# EAGLE board smd_old (EAGLE 7.3.0)
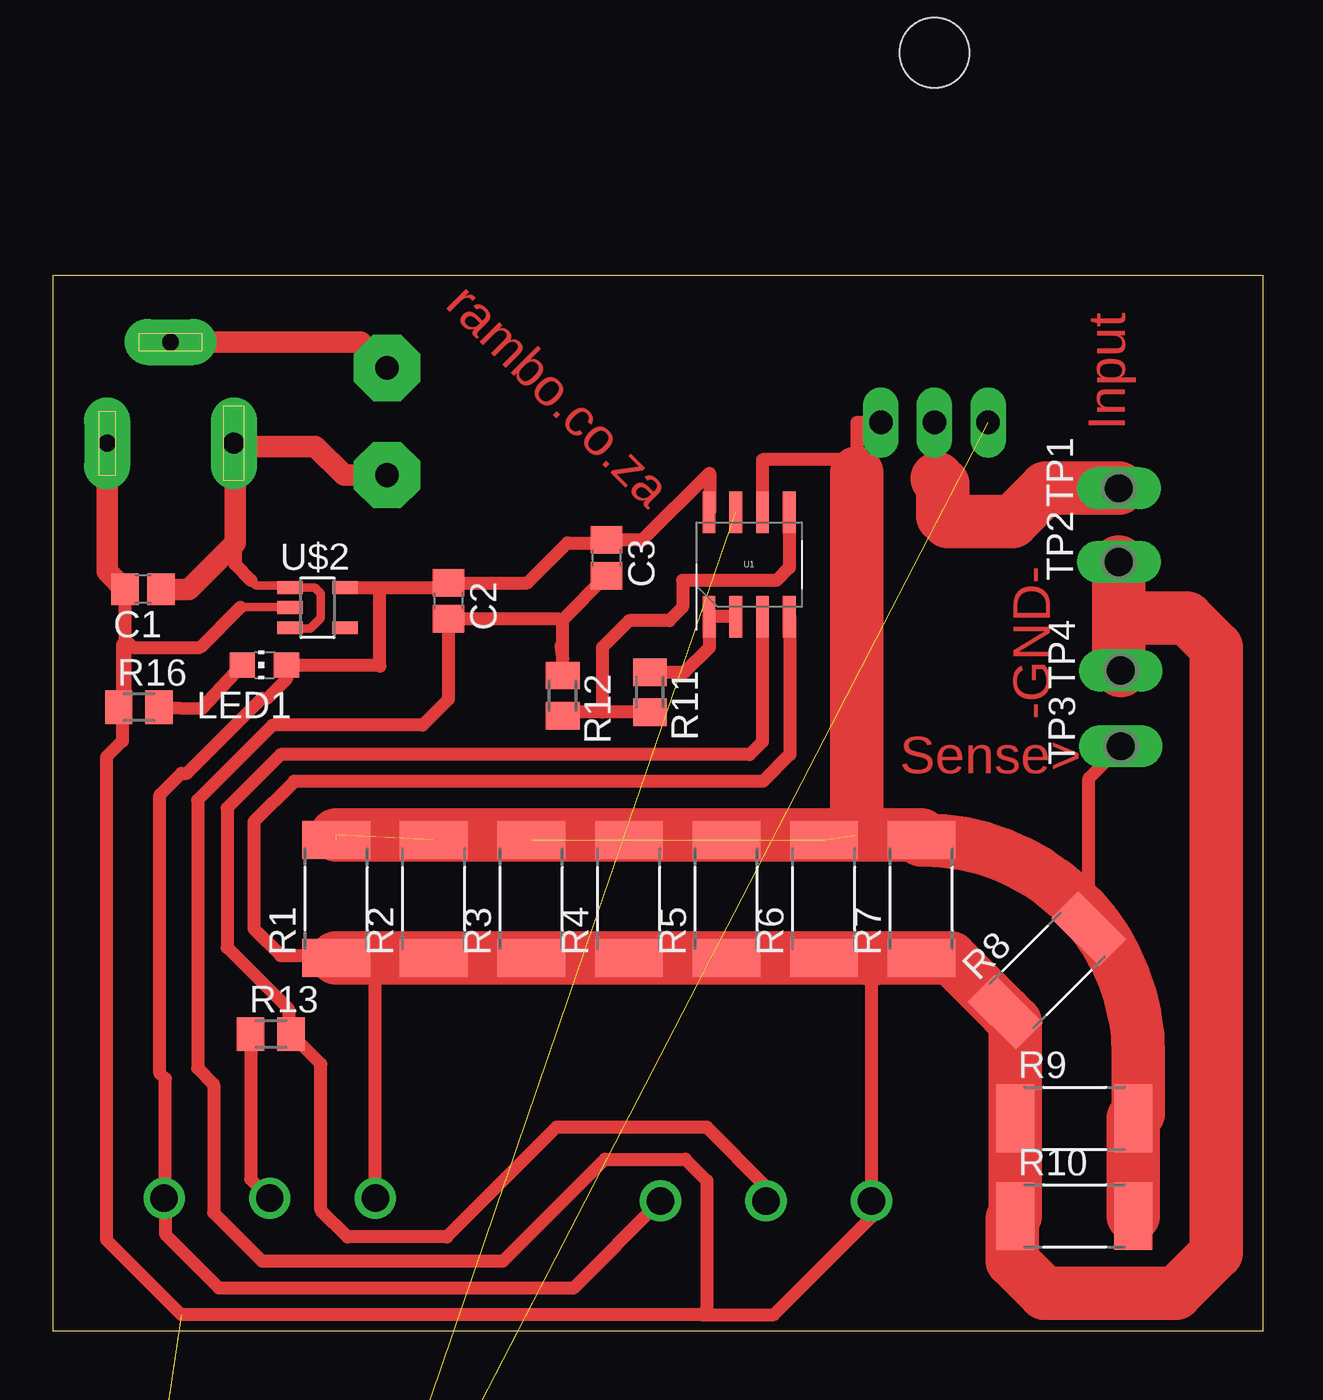
[diagram p0: board, top side]
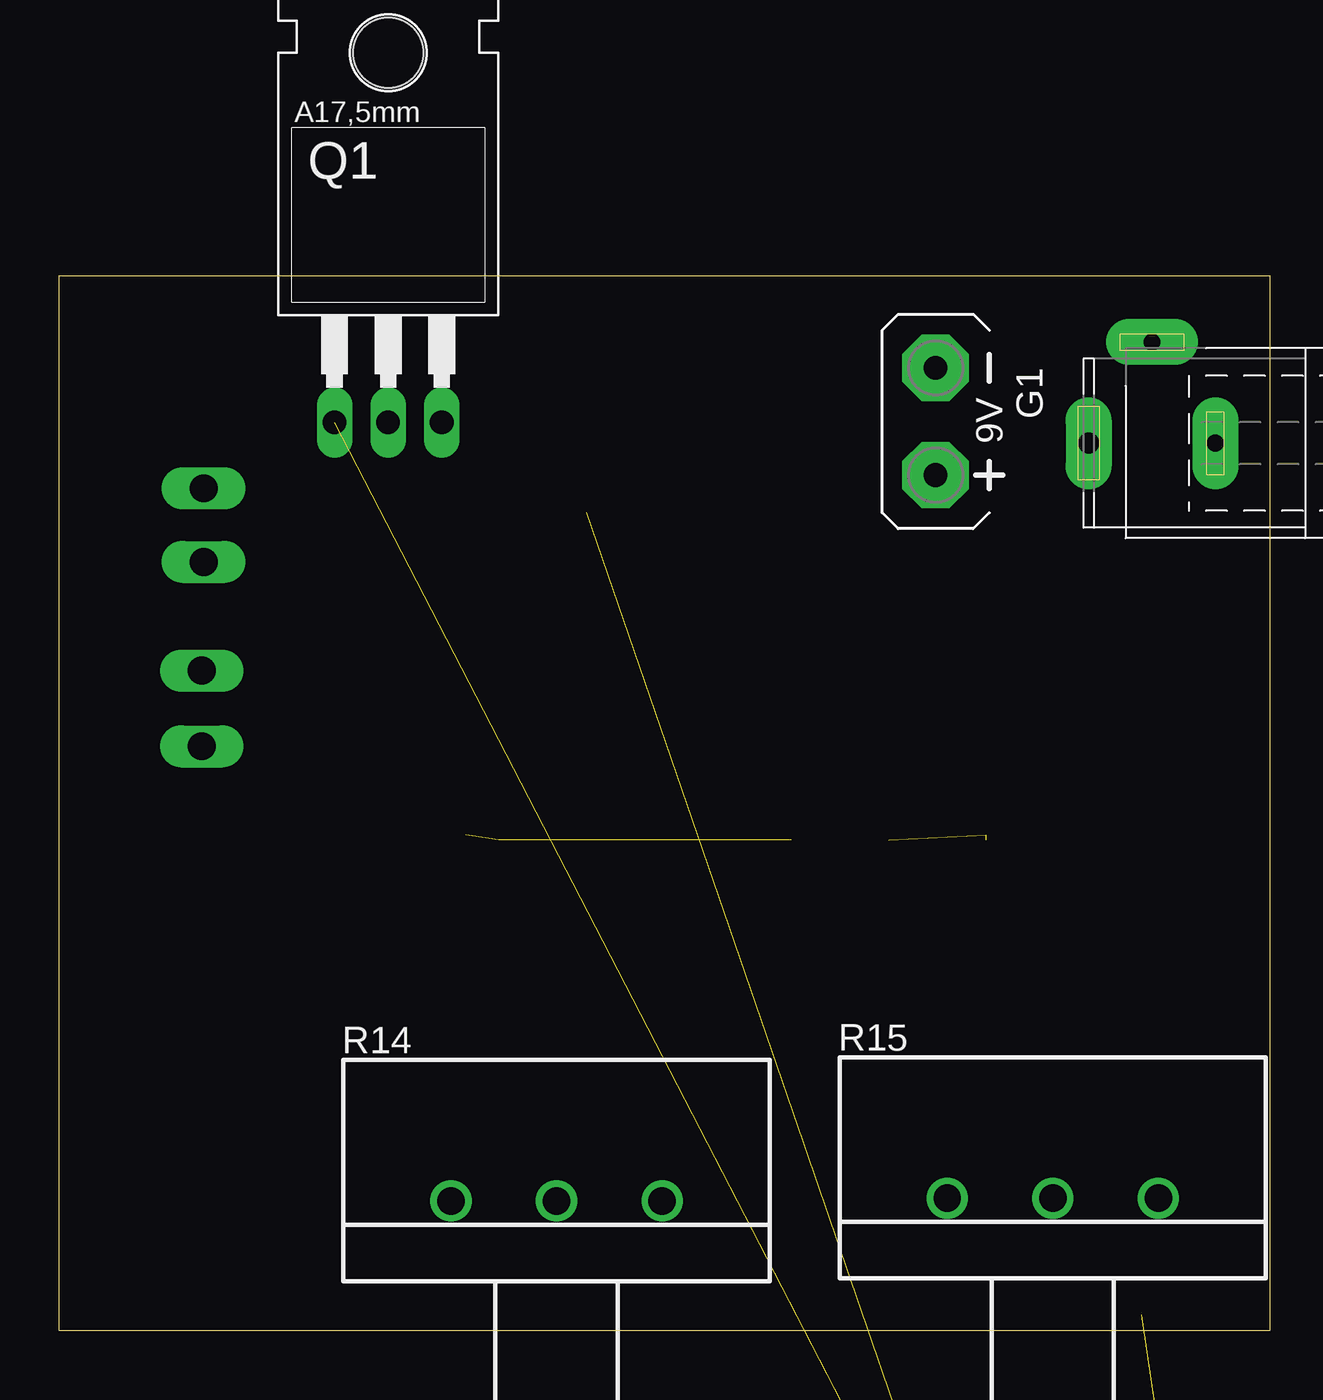
[diagram p1: board, bottom side, seen from below]

Size 57.34 x 49.99 mm. Coordinates in mm from the lower left corner, seen from the top.
Outline: 0,0 57.34,0 57.34,49.99 0,49.99 0,0
Copper layers (1*16): Top 0.035mm / dielectric 1.5mm / Bottom 0.035mm
Design rules "default": minimum track width 10mil, minimum drill 24mil, track to track 8mil, track to pad 8mil, pad to pad 8mil, via to via 8mil, smd to smd 8mil, copper to edge 40mil, drill to drill 8mil, minimum pad ring 10mil, minimum via ring 8mil, stop-mask expansion 4mil, vias tented up to drill 0mil, thermal gap 10mil

## Footprints (pad centres in the part's own frame; a part is rotated, then mirrored left to right if it is on the bottom)
C0805 = smd 1.3 x 1.5: 1 -0.85,0; 2 0.85,0
AB9V = drill 1.118 pad 3.15 octagon: + 0,2.54; - 0,-2.54
SPC4077 = drill 0.8 pad 2.184 long: 1 -3,0; 2 0,-4.8 | drill 1 pad 2.184 long: 3 3,0
CHIP-LED0805 = smd 1.2 x 1.2: A 0,-1.05; C 0,1.05
TO220 = drill 1.118 long: 1 -2.54,-6.35; 2 0,-6.35; 3 2.54,-6.35 | hole 3.302: 0,11.176
R2512 = smd 1.8 x 3.2: 1 -2.8,0; 2 2.8,0
M0805 = smd 1.3 x 1.6: 1 -0.95,0; 2 0.95,0
CIP20C-4MM = drill 1.3 pad 1.93: A -5,0; E 5,0; S 0,0
P1-13Y = drill 1.321 pad 1.905 long: TP 0,0
ANDREW/B6D66 = smd 0.6 x 1.98: 1 -1.905,-2.475; 2 -0.635,-2.475; 3 0.635,-2.475; 4 1.905,-2.475; 5 1.905,2.475; 6 0.635,2.475; 7 -0.635,2.475; 8 -1.905,2.475
DBV-R-PDSO-G5 = smd 0.6 x 1.2: 1 -0.95,-1.306; 2 0,-1.306; 3 0.95,-1.306; 4 0.95,1.306; 5 -0.95,1.306

## Placement (x,y rotation side)
C1  1uF  [C0805]  4.27,35.13 180 top
C2  1uF  [C0805]  18.75,34.59 270 top
C3  0.1uF  [C0805]  26.23,36.63 270 top
C4  1uF  [C0805]  -3.17,-56.13 0 top  (outside the outline)
G1  AB9V  [AB9V]  15.83,43.09 180 bottom
J1  [SPC4077]  5.58,42.06 180 bottom
LED1  [CHIP-LED0805]  10.03,31.55 90 top
Q1  IRF540  [TO220]  41.77,49.39 0 bottom
R1  10R  [R2512]  13.43,20.46 90 top
R2  10R  [R2512]  18.05,20.46 90 top
R3  10R  [R2512]  22.67,20.46 90 top
R4  10R  [R2512]  27.29,20.46 90 top
R5  10R  [R2512]  31.91,20.46 90 top
R6  10R  [R2512]  36.53,20.46 90 top
R7  10R  [R2512]  41.15,20.46 90 top
R8  10R  [R2512]  47.1,17.07 45 top
R9  10R  [R2512]  48.4,10.06 0 top
R10  10R  [R2512]  48.4,5.44 0 top
R11  24K  [M0805]  28.3,30.26 270 top
R12  10K  [M0805]  24.16,30.1 270 top
R13  56K  [M0805]  10.33,14.06 0 top
R14  50K  [CIP20C-4MM]  33.79,6.15 0 bottom
R15  50K  [CIP20C-4MM]  10.28,6.28 0 bottom
R16  10K  [M0805]  4.08,29.55 0 top
R17  10  [M0805]  -3.17,-50.55 0 top  (outside the outline)
R18  100  [M0805]  -3.17,-61.72 0 top  (outside the outline)
TP1  TPPAD1-13Y  [P1-13Y]  50.51,39.92 90 top
TP2  TPPAD1-13Y  [P1-13Y]  50.51,36.43 90 top
TP3  TPPAD1-13Y  [P1-13Y]  50.6,27.7 90 top
TP4  TPPAD1-13Y  [P1-13Y]  50.6,31.29 90 top
U1  798-TLC2272CD  [ANDREW/B6D66]  32.99,36.31 0 top
U$2  TPS783XX  [DBV-R-PDSO-G5]  12.54,34.27 270 top

## Library data of the parts
C1-C4 R1-R13 R16-R18 = resistor
G1 = battery
J1 = con-jack; OC_FARNELL: unknown; OC_NEWARK: unknown
LED1 = led
Q1 = transistor-fet
R14 R15 = pot
TP1-TP4 = testpad
U1 = CircuitHub; URL: https://circuithub.com/parts/TI/TLC2272CD
U$2 = RobThePyro

## Nets
GND: C1.2 C2.2 C3.2 C4.2 J1.1 R1.1 R2.1 R3.1 R4.1 R5.1 R6.1 R7.1 R8.1 R9.1 R10.1 R12.1 R14.A R15.A R16.1 TP2.TP TP4.TP U1.4 U$2.2
N$1: C1.1 G1.+ J1.3 U$2.1 U$2.3
N$2: Q1.3 R1.2 R2.2 R3.2 R4.2 R5.2 R6.2 R7.2 R8.2 R9.2 R10.2 TP3.TP U1.6
N$3: Q1.2 TP1.TP
N$4: R18.2 U1.7
N$5: G1.- J1.2
N$6: R11.1 U1.1 U1.2
N$7: R11.2 R12.2 U1.5
N$8: R13.2 R14.S U1.3
N$9: R13.1 R15.S
N$10: LED1.C R16.2
N$11: C4.1 R17.2 R18.1
N$12: Q1.1 R17.1
VCC: C2.1 C3.1 LED1.A R14.E R15.E U1.8 U$2.5

## Tracks (layer width: path | path; a pad name or v marks a point on that pad's centre or on a via)
GND  (1 unrouted)
  Top 0.406: C1.2 3.27,34.5 | 8.89,34.29 11.21,34.29 U$2.2
  Top 0.61: U1.4 34.92,33.84 34.92,27.3 33.66,26.04 11.43,26.04 9.53,24.13 9.53,19.05 10.79,17.78 13.31,17.78 R1.1 | R12.1 24.16,31.75 | 24.16,31.75 24.16,33.53 | 24.16,33.53 24.16,33.72 C3.2 | 24.07,32.47 24.16,31.75 | 38.79,17.61 R14.A 38.79,5.39 34.16,0.76 30.73,0.76 | R16.1 3.42,29.84 C1.2 3.42,32.77 3.81,32.38 | 3.81,32.38 6.99,32.38 8.89,34.29 | 3.81,32.38 3.43,32.38 3.3,32.51 3.3,27.94 2.54,27.18 2.54,4.32 6.1,0.76 30.73,0.76 | 30.73,0.76 30.99,1.02 30.99,7.11 29.97,8.13 26.16,8.13 21.34,3.3 9.91,3.3 7.62,5.59 7.62,11.68 6.86,12.45 6.86,25.15 10.41,28.7 17.53,28.7 18.75,29.92 C2.2 23.95,33.74 24.16,33.53 | R15.A 15.28,17.49 15.11,17.66
  Top 1.016: J1.1 2.58,35.98 C1.2
  Top 2.54: R1.1 15.11,17.66 R2.1 R3.1 R4.1 R5.1 R6.1 38.73,17.66 | 38.73,17.66 R7.1 42.55,17.66 R8.1 45.6,14.61 R9.1 R10.1 45.47,5.31 45.47,3.3 46.99,1.78 53.21,1.78 55.12,3.68 55.12,32.38 53.72,33.78 50.55,33.78 50.51,33.75 | 38.79,17.61 38.73,17.66 | TP2.TP 50.51,33.75 | TP4.TP 50.51,31.38 50.51,33.75
N$1
  Top 0.406: U$2.3 11.28,33.27 12.19,33.27 12.7,33.78 12.7,34.92 12.4,35.22 U$2.1 11.15,35.31 9.65,35.31 9.4,35.56
  Top 0.61: 8.64,37.34 8.64,36.32 9.4,35.56
  Top 1.016: G1.+ 13.81,40.55 12.45,41.91 8.73,41.91 J1.3 8.64,42 8.64,37.34 6.43,35.13 C1.1
N$2  (6 unrouted)
  Top 0.61: Q1.3 38.1,43.04 38.1,41.27 | 38.1,40.64 38.1,41.27 | 38.1,41.27 33.62,41.27 U1.6 | TP3.TP 49.08,26.18 R8.2 49.08,18.35 51.05,16.38 51.05,13.46 51.44,13.08
  Top 2.54: 38.1,40.64 38.1,23.5 | 38.1,23.5 13.43,23.5 | 38.1,23.5 41.15,23.5 R7.2 41.26,23.26 arc-90 51.44,13.08 51.44,10.3 R9.2 R10.2
N$3
  Top 0.61: Q1.2 41.91,43.04 41.91,40.39 41.91,40.01
  Top 2.54: TP1.TP 47.04,39.92 45.47,38.35 42.42,38.35 42.16,38.61 42.16,40.13 41.91,40.39
N$4  (1 unrouted)
N$5
  Top 1.016: J1.2 14.6,46.86 G1.-
N$6
  Top 0.61: U1.2 U1.1 31.11,33.8 31.11,32.38 29.94,31.21 R11.1
N$7
  Top 0.61: R11.2 26.04,29.31 | 26.04,29.31 24.32,29.31 R12.2 | U1.5 34.9,36.16 34.29,35.56 29.84,35.56 29.84,34.29 29.21,33.66 27.3,33.66 26.04,32.38 26.04,29.31
N$8
  Top 0.61: U1.3 33.62,27.91 33.02,27.3 10.79,27.3 8.26,24.77 8.26,18.16 11.18,15.24 11.18,14.16 R13.2 12.7,12.63 12.7,5.71 13.97,4.45 18.67,4.45 23.88,9.65 30.99,9.65 33.79,6.85 R14.S
N$9
  Top 0.61: 10.16,6.91 R15.S 9.38,7.18 R13.1
N$10
  Top 0.61: R16.2 7.06,29.49 LED1.C
N$11  (2 unrouted)
N$12  (1 unrouted)
VCC
  Top 0.61: 26.21,37.47 C3.1 | C3.1 27.96,37.48 31.11,40.64 31.11,38.81 U1.8 | 5.28,6.15 R15.E 5.33,6.33 | U$2.5 15.49,35.22 | 15.49,35.22 18.52,35.22 C2.1 22.49,35.44 24.38,37.34 26.08,37.34 C3.1 | 15.49,35.22 15.49,31.5 15.44,31.55 LED1.A 11.08,30.89 10.16,29.97 9.91,29.97 6.35,26.42 6.1,26.42 5.08,25.4 5.08,12.19 5.33,11.94 5.33,6.33 | 5.33,6.33 5.33,4.57 7.87,2.03 24.67,2.03 R14.E

## Text on the board
Top: Input | rambo.co.za | -GND- | Sense>